# EAGLE board ChargingCircuit (EAGLE 7.6.0)

Size 223.49 x 92.29 mm. Coordinates in mm from the lower left corner, seen from the top.
Outline: 123.49,12.29 223.49,12.29 223.49,92.29 123.49,92.29 123.49,12.29
Copper layers (1*16): Top 0.035mm / dielectric 1.5mm / Bottom 0.035mm
Design rules "default": minimum track width 10mil, minimum drill 24mil, track to track 8mil, track to pad 8mil, pad to pad 8mil, via to via 8mil, smd to smd 8mil, copper to edge 40mil, drill to drill 8mil, minimum pad ring 10mil, minimum via ring 8mil, stop-mask expansion 4mil, vias tented up to drill 0mil, thermal gap 10mil

## Footprints (pad centres in the part's own frame; a part is rotated, then mirrored left to right if it is on the bottom)
0805 = smd 0.8 x 1.2: 1 -0.9,0; 2 0.9,0
0805-DIODE = smd 0.8 x 1.2: 1 -0.9,0; 2 0.9,0
DO-214AB = smd 2 x 3.4: NEG 3.34,0.17; POS -3.31,0.17
LED-0603 = smd 1 x 1: A 0,-0.877; C 0,0.877
SMA-DIODE = smd 1.27 x 1.47: A -2.15,0; C 2.15,0
DEANS = drill 1.27 pad 3.556 long: + 0,0; - 0.737,-6.921
1X04-1.5MM_JST = drill 0.7: 1 0,0; 2 1.5,0; 3 3,0; 4 4.5,0
SO08 = smd 0.61 x 2.21: 1 -1.905,-2.616; 2 -0.635,-2.616; 3 0.635,-2.616; 4 1.905,-2.616; 5 1.905,2.616; 6 0.635,2.616; 7 -0.635,2.616; 8 -1.905,2.616
SON-8 = smd 0.5 x 0.83: P$1 -0.975,-1.435; P$2 -0.325,-1.435; P$3 0.325,-1.435; P$4 0.975,-1.435; P$5 0.975,1.435; P$6 0.325,1.435; P$7 -0.325,1.435; P$8 -0.975,1.435
SD-5738 = smd 0.8 x 2: P$1 -6.88,-1; P$2 -4.38,-1; P$3 -1.08,-1; P$4 0.62,-1; P$5 3.12,-1; P$6 5.62,-1; P$7 8.05,-1; P$8 9.75,-1; P$9 -9.38,-1; P$CARDDETECT 11.75,-1 | smd 2 x 0.8: P$COM 14.35,9.95; P$WRITEPROTECT 14.35,20
SSOP20 = smd 0.4 x 1.5: 1 -2.925,-3.625; 2 -2.275,-3.625; 3 -1.625,-3.625; 4 -0.975,-3.625; 5 -0.325,-3.625; 6 0.325,-3.625; 7 0.975,-3.625; 8 1.625,-3.625; 9 2.275,-3.625; 10 2.925,-3.625; 11 2.925,3.625; 12 2.275,3.625; 13 1.625,3.625; 14 0.975,3.625; 15 0.325,3.625; 16 -0.325,3.625; 17 -0.975,3.625; 18 -1.625,3.625; 19 -2.275,3.625; 20 -2.925,3.625
POWER-SOP8 = smd 0.4 x 1.6: 1 -0.975,-2.1; 2 -0.325,-2.1; 3 0.325,-2.1; 4 0.975,-2.1; 5 0.975,2.1; 6 0.325,2.1; 7 -0.325,2.1; 8 -0.975,2.1 | smd 1.89 x 1.57: 9 0,0
S-PVQFN-N32 = smd 0.28 x 0.85: P$1 -1.75,2.475; P$2 -1.25,2.475; P$3 -0.75,2.475; P$4 -0.25,2.475; P$5 0.25,2.475; P$6 0.75,2.475; P$7 1.25,2.475; P$8 1.75,2.475; P$17 1.75,-2.475; P$18 1.25,-2.475; P$19 0.75,-2.475; P$20 0.25,-2.475; P$21 -0.25,-2.475; P$22 -0.75,-2.475; P$23 -1.25,-2.475; P$24 -1.75,-2.475 | smd 0.85 x 0.28: P$9 2.475,1.75; P$10 2.475,1.25; P$11 2.475,0.75; P$12 2.475,0.25; P$13 2.475,-0.25; P$14 2.475,-0.75; P$15 2.475,-1.25; P$16 2.475,-1.75; P$25 -2.475,-1.75; P$26 -2.475,-1.25; P$27 -2.475,-0.75; P$28 -2.475,-0.25; P$29 -2.475,0.25; P$30 -2.475,0.75; P$31 -2.475,1.25; P$32 -2.475,1.75 | smd 3.45 x 3.45: P$GND 0,0
WSON-8 = smd 0.5 x 0.25: P$1 -0.95,0.75; P$2 -0.95,0.25; P$3 -0.95,-0.25; P$4 -0.95,-0.75; P$5 0.95,-0.75; P$6 0.95,-0.25; P$7 0.95,0.25; P$8 0.95,0.75 | smd 0.9 x 1.6: P$GND 0,0
20-VQFN = smd 0.825 x 0.28: P$1 -2.112,0.75; P$10 2.112,0.75; P$11 2.112,-0.75; P$20 -2.112,-0.75 | smd 0.28 x 0.825: P$2 -1.75,1.613; P$3 -1.25,1.613; P$4 -0.75,1.613; P$5 -0.25,1.613; P$6 0.25,1.613; P$7 0.75,1.613; P$8 1.25,1.613; P$9 1.75,1.613; P$12 1.75,-1.613; P$13 1.25,-1.613; P$14 0.75,-1.613; P$15 0.25,-1.613; P$16 -0.25,-1.613; P$17 -0.75,-1.613; P$18 -1.25,-1.613; P$19 -1.75,-1.613
SOD-323F = smd 0.8 x 0.8: 1 -1.125,0; 2 1.125,0

## Placement (x,y rotation side)
C1  68uF  [0805]  151.43,22.45 270 top
C2  0.1uF  [0805]  151.43,17.37 270 top
C3  47nF  [0805]  131.11,28.8 270 top
C4  0.1uF  [0805]  127.3,28.8 90 top
C5  4.7uF  [0805]  127.3,21.18 270 top
C6  0.1uF  [0805]  127.3,24.99 90 top
C7  0.1uF  [0805]  151.43,31.34 270 top
C8  [0805]  43.48,13.56 0 top
C9  [0805]  39.67,13.56 0 top
C10  1uF  [0805]  16.81,7.21 0 top
C11  0.1uF  [0805]  13,7.21 0 top
C12  0.1uF  [0805]  9.19,7.21 0 top
C13  22pF  [0805]  -68.28,-77.88 0 top  (outside the outline)
C14  0.1uF  [0805]  -72.09,-77.88 0 top  (outside the outline)
C15  0.1uF  [0805]  -75.9,-77.88 0 top  (outside the outline)
C16  0.1uF  [0805]  -79.71,-77.88 0 top  (outside the outline)
C17  22pF  [0805]  -83.52,-77.88 0 top  (outside the outline)
C18  0.1uF  [0805]  -98.76,-82.96 0 top  (outside the outline)
C19  0.1uF  [0805]  -102.57,-82.96 0 top  (outside the outline)
C20  0.1uF  [0805]  -110.19,-88.04 0 top  (outside the outline)
C21  0.1uF  [0805]  -114,-95.66 0 top  (outside the outline)
C22  2.2uF  [0805]  -129.24,-103.28 0 top  (outside the outline)
C23  2.2uF  [0805]  -144.48,-123.6 0 top  (outside the outline)
C24  0.1uF  [0805]  -159.72,-123.6 0 top  (outside the outline)
C25  0.1uF  [0805]  -163.53,-123.6 0 top  (outside the outline)
C26  0.1uF  [0805]  -178.77,-128.68 0 top  (outside the outline)
C27  2.2uF  [0805]  -190.2,-128.68 0 top  (outside the outline)
C29  0.1uF  [0805]  -220.68,-128.68 0 top  (outside the outline)
C30  0.1uF  [0805]  -224.49,-128.68 0 top  (outside the outline)
C31  0.1uF  [0805]  -228.3,-128.68 0 top  (outside the outline)
C32  0.1uF  [0805]  -232.11,-128.68 0 top  (outside the outline)
C33  0.1uF  [0805]  -235.92,-128.68 0 top  (outside the outline)
C34  0.1uF  [0805]  -239.73,-128.68 0 top  (outside the outline)
C35  0.1uF  [0805]  -258.78,-132.49 0 top  (outside the outline)
C36  0.1uF  [0805]  -262.59,-132.49 0 top  (outside the outline)
C37  0.1uF  [0805]  -274.02,-132.49 0 top  (outside the outline)
C38  0.1uF  [0805]  -277.83,-132.49 0 top  (outside the outline)
C39  0.1uF  [0805]  -285.45,-132.49 0 top  (outside the outline)
C40  0.1uF  [0805]  -289.26,-132.49 0 top  (outside the outline)
C101  [0805]  70.15,13.56 0 top
C102  [0805]  73.96,13.56 0 top
CBOOT1  [0805]  77.77,13.56 0 top
CBOOT2  [0805]  66.34,13.56 0 top
CCLAMP1  [0805]  54.91,13.56 0 top
CCLAMP2  [0805]  58.72,13.56 0 top
CCOMM1  [0805]  81.58,13.56 0 top
CCOMM2  [0805]  62.53,13.56 0 top
D1  1N4148-0805  [0805-DIODE]  155.24,31.34 90 top
D2  MBRS340T3  [DO-214AB]  132.38,41.5 180 top
D3  MBRS340T3  [DO-214AB]  143.81,41.5 180 top
D4  BLUE  [LED-0603]  28.24,13.56 0 top
D5  MBRA140  [SMA-DIODE]  -111.46,-100.74 0 top  (outside the outline)
D6  MBRA140  [SMA-DIODE]  -119.08,-104.55 0 top  (outside the outline)
D7  1N4148-0805  [0805-DIODE]  -125.43,-103.28 0 top  (outside the outline)
D8  1N4148-0805  [0805-DIODE]  -182.58,-128.68 0 top  (outside the outline)
FRAME6  FRAME-LEDGER  [CREATIVE_COMMONS]  16.81,-52.48 0 top  (outside the outline)
FRAME7  FRAME-LEDGER  [CREATIVE_COMMONS]  16.81,-61.37 0 top  (outside the outline)
FRAME8  FRAME-LEDGER  [CREATIVE_COMMONS]  16.81,-70.26 0 top  (outside the outline)
FRAME9  FRAME-LEDGER  [CREATIVE_COMMONS]  16.81,-79.15 0 top  (outside the outline)
J1  BATTERY_CONNDEANS  [DEANS]  2.84,9.75 0 top
J2  [1X04-1.5MM_JST]  -246.08,-133.76 0 top  (outside the outline)
L1  [0805]  152.7,36.42 0 top
L2  2.2uH  [0805]  -106.38,-88.04 0 top  (outside the outline)
M1  IRF7303  [SO08]  140,32.61 90 top
Q1  CSD17308Q3  [SON-8]  -86.06,-82.96 0 top  (outside the outline)
Q2  CSD17308Q3  [SON-8]  -101.3,-88.04 0 top  (outside the outline)
Q3  CSD17308Q3  [SON-8]  -135.59,-108.36 0 top  (outside the outline)
Q4  CSD17308Q3  [SON-8]  -139.4,-113.44 0 top  (outside the outline)
Q5  CSD17308Q3  [SON-8]  -139.4,-118.52 0 top  (outside the outline)
Q6  CSD17308Q3  [SON-8]  -139.4,-123.6 0 top  (outside the outline)
Q7  CSD17308Q3  [SON-8]  -169.88,-128.68 0 top  (outside the outline)
R1  0.2  [0805]  151.43,27.53 90 top
R2  10k  [0805]  127.3,17.37 270 top
R3  100k  [0805]  143.81,16.1 0 top
R4  [0805]  51.1,13.56 0 top
R5  [0805]  47.29,13.56 0 top
R6  [0805]  35.86,13.56 0 top
R7  150k  [0805]  24.43,7.21 0 top
R8  150k  [0805]  20.62,7.21 0 top
R9  100  [0805]  -22.56,-77.88 0 top  (outside the outline)
R10  1k  [0805]  -26.37,-77.88 0 top  (outside the outline)
R11  100k  [0805]  143.81,18.64 180 top
R12  [0805]  131.11,32.61 270 top
R13  100  [0805]  -30.18,-77.88 0 top  (outside the outline)
R14  100  [0805]  -33.99,-77.88 0 top  (outside the outline)
R15  10k  [0805]  155.24,22.45 270 top
R16  [0805]  155.24,17.37 90 top
R17  100  [0805]  -37.8,-77.88 0 top  (outside the outline)
R18  100  [0805]  -41.61,-77.88 0 top  (outside the outline)
R19  100  [0805]  -45.42,-77.88 0 top  (outside the outline)
R20  35.63k  [0805]  -60.66,-77.88 0 top  (outside the outline)
R21  332k  [0805]  -64.47,-77.88 0 top  (outside the outline)
R22  10m  [0805]  -87.33,-77.88 0 top  (outside the outline)
R23  10k  [0805]  -91.14,-82.96 0 top  (outside the outline)
R24  5.1k  [0805]  -94.95,-82.96 0 top  (outside the outline)
R25  5.1k  [0805]  -117.81,-99.47 0 top  (outside the outline)
R26  1  [0805]  -121.62,-99.47 0 top  (outside the outline)
R27  100k  [0805]  -133.05,-103.28 0 top  (outside the outline)
R28  2  [0805]  -136.86,-103.28 0 top  (outside the outline)
R29  10M  [0805]  -140.67,-108.36 0 top  (outside the outline)
R30  5.1k  [0805]  -148.29,-123.6 0 top  (outside the outline)
R31  10M  [0805]  -152.1,-123.6 0 top  (outside the outline)
R32  10k  [0805]  -155.91,-123.6 0 top  (outside the outline)
R33  5.1k  [0805]  -167.34,-123.6 0 top  (outside the outline)
R34  10M  [0805]  -171.15,-123.6 0 top  (outside the outline)
R35  5.1k  [0805]  -174.96,-128.68 0 top  (outside the outline)
R36  10  [0805]  -186.39,-128.68 0 top  (outside the outline)
R37  100  [0805]  -194.01,-128.68 0 top  (outside the outline)
R38  100  [0805]  -197.82,-128.68 0 top  (outside the outline)
R39  100  [0805]  -201.63,-128.68 0 top  (outside the outline)
R40  1k  [0805]  -251.16,-132.49 0 top  (outside the outline)
R41  100  [0805]  -209.25,-128.68 0 top  (outside the outline)
R42  100  [0805]  -213.06,-128.68 0 top  (outside the outline)
R43  5m  [0805]  -243.54,-128.68 0 top  (outside the outline)
R44  5.1k  [0805]  -247.35,-128.68 0 top  (outside the outline)
R45  100  [0805]  -254.97,-132.49 0 top  (outside the outline)
R46  1k  [0805]  -266.4,-132.49 0 top  (outside the outline)
R47  1k  [0805]  -281.64,-132.49 0 top  (outside the outline)
RT1  10k-PTC  [0805]  -7.32,-77.88 0 top  (outside the outline)
RT2  [0805]  -11.13,-77.88 0 top  (outside the outline)
RT3  [0805]  -14.94,-77.88 0 top  (outside the outline)
RT4  [0805]  -18.75,-77.88 0 top  (outside the outline)
SD1  5738-SDCARD  [SD-5738]  206.04,36.42 180 top
THM1  10K - NTC  [0805]  155.24,27.53 270 top
THM2  10K-NTC  [0805]  32.05,13.56 0 top
U1  MAX745EACSSOP  [SSOP20]  140,24.99 270 top
U2  TPA2005D1DGN  [POWER-SOP8]  11.73,0.86 0 top
U3  BQ40Z60  [S-PVQFN-N32]  1.57,-41.05 0 top  (outside the outline)
U4  BQ2947  [WSON-8]  -3.51,-41.05 0 top  (outside the outline)
WPC-RX1  BQ51013B-20VQFN  [20-VQFN]  86.66,14.83 0 top
Z1  MM3Z75VC  [SOD-323F]  -49.23,-77.88 0 top  (outside the outline)
Z2  MM3Z75VC  [SOD-323F]  -53.04,-77.88 0 top  (outside the outline)
Z3  MM3Z75VC  [SOD-323F]  -56.85,-77.88 0 top  (outside the outline)

## Library data of the parts
C1-C27 C29-C40 C101 C102 CBOOT1 CBOOT2 CCLAMP1 CCLAMP2 CCOMM1 CCOMM2 = SparkFun-Capacitors
D1-D3 D7 D8 M1 Q1-Q7 RT1-RT4 SD1 THM1 THM2 U1 U3 U4 WPC-RX1 Z1-Z3 = BB8
D4 = SparkFun-LED; PROD_ID: DIO-08575
D5 D6 = SparkFun-DiscreteSemi; PROD_ID: DIO-08053
FRAME6-FRAME9 = SparkFun-Aesthetics
J1 = SparkFun-Connectors
J2 = SparkFun-Connectors; PROD_ID: CONN-12477
L1 L2 R1-R8 R11 R12 R15 R16 = SparkFun-Passives
R9 R10 R13 R14 R17-R47 = SparkFun-Resistors
U2 = SparkFun-AnalogIC

## Nets
AC1: C101.2 C102.1 CBOOT1.1 CCLAMP1.1 CCOMM1.1 WPC-RX1.P$2
AC2: C102.2 CBOOT2.1 CCLAMP2.1 CCOMM2.1 WPC-RX1.P$19
ALERT: R9.2
AUDIO_OUT+: U2.5
AUDIO_OUT-: U2.8
AUDIOIN: C11.1
BI-STATE: WPC-RX1.P$10
BI-STATE2: WPC-RX1.P$11
BOOT2: CBOOT2.2 WPC-RX1.P$17
CELL0: U1.12
CELL1: U1.11
CS: SD1.P$1
GND: C1.2 C2.1 C3.1 C4.2 C5.2 C6.2 C8.2 C9.2 C10.2 C12.2 C14.2 C15.2 C17.1 C19.1 C21.2 C22.1 C23.1 C26.2 C27.2 C30.2 C31.2 C32.2 C34.2 C35.2 C38.2 C39.1 C40.2 D2.POS J1.- J2.4 M1.3 Q2.P$1 Q2.P$2 Q2.P$3 Q7.P$1 Q7.P$2 Q7.P$3 R5.2 R11.1 R12.1 R20.1 R23.2 R27.2 R35.2 R42.1 R43.1 RT1.2 RT2.2 RT3.2 RT4.2 SD1.P$3 SD1.P$6 THM1.1 THM2.2 U1.1 U1.10 U1.16 U2.7 U2.9 U3.P$9 U3.P$24 U3.P$GND U4.P$6 U4.P$GND WPC-RX1.P$1 WPC-RX1.P$9 WPC-RX1.P$20 Z1.1 Z2.1 Z3.1
MISO: SD1.P$7
MOSI: SD1.P$2
N$1: C5.1 D1.1 U1.3
N$2: C7.1 D1.2 U1.20
N$3: M1.2 U1.18
N$4: M1.4 U1.17
N$5: D3.NEG R1.2 U1.15
N$6: D3.POS L1.2
N$7: C1.1 J1.+ R1.1 U1.14
N$8: C7.2 D2.NEG L1.1 M1.1 M1.5 M1.6 U1.19
N$9: C3.2 U1.5
N$10: R2.1 U1.4
N$11: C2.2 R2.2
N$12: C4.1 R3.2 R15.2 R16.2 U1.7
N$13: R12.2 R16.1 U1.9
N$14: R15.1 THM1.2 U1.6
N$15: R3.1 R11.2 U1.8
N$16: CCOMM2.2 WPC-RX1.P$15
N$17: CCLAMP2.2 WPC-RX1.P$16
N$18: CCLAMP1.2 WPC-RX1.P$5
N$19: CBOOT1.2 WPC-RX1.P$3
N$20: CCOMM1.2 WPC-RX1.P$6
N$21: C101.1
N$22: R4.1 WPC-RX1.P$12
N$23: R4.2 R5.1 R6.1 WPC-RX1.P$14
N$24: D4.C WPC-RX1.P$7
N$25: C9.1 R6.2 WPC-RX1.P$18
N$26: R7.2 U2.3
N$27: SD1.P$4
N$28: C11.2 R7.1
N$29: R10.1 R13.2 Z1.2
N$30: R8.2 U2.4
N$31: RT1.1 U3.P$10
N$32: C12.1 R8.1
N$33: RT2.1 U3.P$11
N$34: RT3.1 U3.P$12
N$35: RT4.1 U3.P$13
N$36: R9.1 U3.P$14
N$37: Q1.P$5 Q1.P$6 Q1.P$7 Q1.P$8 Q3.P$4 R24.1 R29.2
N$38: R13.1 U3.P$15
N$39: R14.1 U3.P$16
N$40: R14.2 R17.1 Z2.2
N$41: C13.1 R20.2 R21.1 U3.P$18
N$42: R24.2 U3.P$29
N$43: C18.1 C19.2
N$44: R18.1 U3.P$17
N$45: R18.2 R19.1 Z3.2
N$46: C15.1 C16.2 L2.2 Q6.P$1 Q6.P$2 Q6.P$3 R22.2 U3.P$20
N$47: R26.1 U3.P$22
N$48: D6.A Q1.P$4 R23.1
N$50: C20.2 L2.1 Q2.P$5 Q2.P$6 Q2.P$7 Q2.P$8 U3.P$26
N$51: C20.1 D5.C U3.P$28
N$52: C21.1 D5.A U3.P$23
N$53: C23.2 Q3.P$5 Q3.P$6 Q3.P$7 Q3.P$8 Q6.P$5 Q6.P$6 Q6.P$7 Q6.P$8 R26.2
N$54: R25.1 U3.P$21
N$55: C26.1 Q7.P$4 R25.2 R35.1 R44.2
N$56: Q6.P$4 U3.P$27
N$57: D6.C D7.2
N$58: C22.2 R28.2
N$59: Q2.P$4 U3.P$25
N$60: R30.2 U3.P$31
N$61: Q4.P$4 R30.1 R31.2
N$62: R32.2 U3.P$30
N$63: Q4.P$5 Q4.P$6 Q4.P$7 Q4.P$8 Q5.P$5 Q5.P$6 Q5.P$7 Q5.P$8
N$64: C24.2 C25.1
N$65: C24.1 Q5.P$1 Q5.P$2 Q5.P$3 R34.1
N$66: Q5.P$4 R33.1 R34.2
N$67: R33.2 U3.P$32
N$68: C40.1 U4.P$7
N$69: J2.1 R36.1 R37.1 R40.2 R45.2
N$70: D8.2 U3.P$1
N$71: D8.1 R36.2
N$72: C27.1 U3.P$2
N$73: R37.2 U3.P$3
N$74: C29.1 R38.2 U3.P$4
N$75: C29.2 C30.1 R39.2 U3.P$5
N$76: C31.1 U3.P$6
N$77: C32.1 C33.1 R41.2 U3.P$7
N$78: C33.2 C34.1 R42.2 U3.P$8
N$79: R44.1 U4.P$8
N$80: C36.1 R40.1 U4.P$2
N$81: J2.2 R38.1 R46.2
N$82: J2.3 R39.1 R47.1
N$83: C35.1 R45.1 U4.P$1
N$84: C36.2 C37.1 R46.1 U4.P$3
N$85: C37.2 C39.2 R47.2 U4.P$4
N$86: C38.1 U4.P$5
OUT: C8.1 D4.A WPC-RX1.P$4
PACK+: C18.2 D7.1 Q1.P$1 Q1.P$2 Q1.P$3 Q3.P$1 Q3.P$2 Q3.P$3 R27.1 R28.1 R29.1 R32.1
PACK-: R41.1 R43.2
SCK: SD1.P$5
SMBC: R19.2
SMBD: R17.2
SPEAKER_SHUTDOWN: U2.1
STATUS: U1.13
SYSPRES: R10.2
SYSTEMLOAD: C13.2 C14.1 C16.1 C17.2 C25.2 Q4.P$1 Q4.P$2 Q4.P$3 R21.2 R22.1 R31.1 U3.P$19
TRI-STATE: THM2.1 WPC-RX1.P$13
VDD_5V: C10.1 U2.6
VIN: C6.1 M1.7 M1.8 U1.2

## Tracks (layer width: path | path; a pad name or v marks a point on that pad's centre or on a via)
AC1  (5 unrouted)
AC2  (4 unrouted)
BOOT2  (1 unrouted)
GND  (69 unrouted)
N$1  (2 unrouted)
N$2  (2 unrouted)
N$3  (1 unrouted)
N$4  (1 unrouted)
N$5  (2 unrouted)
N$6  (1 unrouted)
N$7  (3 unrouted)
N$8  (6 unrouted)
N$9  (1 unrouted)
N$10  (1 unrouted)
N$11  (1 unrouted)
N$12  (4 unrouted)
N$13  (2 unrouted)
N$14  (2 unrouted)
N$15  (2 unrouted)
N$16  (1 unrouted)
N$17  (1 unrouted)
N$18  (1 unrouted)
N$19  (1 unrouted)
N$20  (1 unrouted)
N$22  (1 unrouted)
N$23  (3 unrouted)
N$24  (1 unrouted)
N$25  (2 unrouted)
N$26  (1 unrouted)
N$28  (1 unrouted)
N$29  (2 unrouted)
N$30  (1 unrouted)
N$31  (1 unrouted)
N$32  (1 unrouted)
N$33  (1 unrouted)
N$34  (1 unrouted)
N$35  (1 unrouted)
N$36  (1 unrouted)
N$37  (6 unrouted)
N$38  (1 unrouted)
N$39  (1 unrouted)
N$40  (2 unrouted)
N$41  (3 unrouted)
N$42  (1 unrouted)
N$43  (1 unrouted)
N$44  (1 unrouted)
N$45  (2 unrouted)
N$46  (7 unrouted)
N$47  (1 unrouted)
N$48  (2 unrouted)
N$50  (6 unrouted)
N$51  (2 unrouted)
N$52  (2 unrouted)
N$53  (9 unrouted)
N$54  (1 unrouted)
N$55  (4 unrouted)
N$56  (1 unrouted)
N$57  (1 unrouted)
N$58  (1 unrouted)
N$59  (1 unrouted)
N$60  (1 unrouted)
N$61  (2 unrouted)
N$62  (1 unrouted)
N$63  (7 unrouted)
N$64  (1 unrouted)
N$65  (4 unrouted)
N$66  (2 unrouted)
N$67  (1 unrouted)
N$68  (1 unrouted)
N$69  (4 unrouted)
N$70  (1 unrouted)
N$71  (1 unrouted)
N$72  (1 unrouted)
N$73  (1 unrouted)
N$74  (2 unrouted)
N$75  (3 unrouted)
N$76  (1 unrouted)
N$77  (3 unrouted)
N$78  (3 unrouted)
N$79  (1 unrouted)
N$80  (2 unrouted)
N$81  (2 unrouted)
N$82  (2 unrouted)
N$83  (2 unrouted)
N$84  (3 unrouted)
N$85  (3 unrouted)
N$86  (1 unrouted)
OUT  (2 unrouted)
PACK+  (11 unrouted)
PACK-  (1 unrouted)
SYSTEMLOAD  (11 unrouted)
TRI-STATE  (1 unrouted)
VDD_5V  (1 unrouted)
VIN  (3 unrouted)